# Altium PCB shield_power.PcbDoc
Units mm, origin at the board's own origin, x right, y up, seen from the top; angles counter-clockwise.
Board outline 100 x 92.5 mm, 2 copper layers (Top Layer, Bottom Layer), stack 1.584 mm thick; 13 components, 9 nets, 34 pads, 10 vias.
Unrouted connection lines stored in the file: 8.
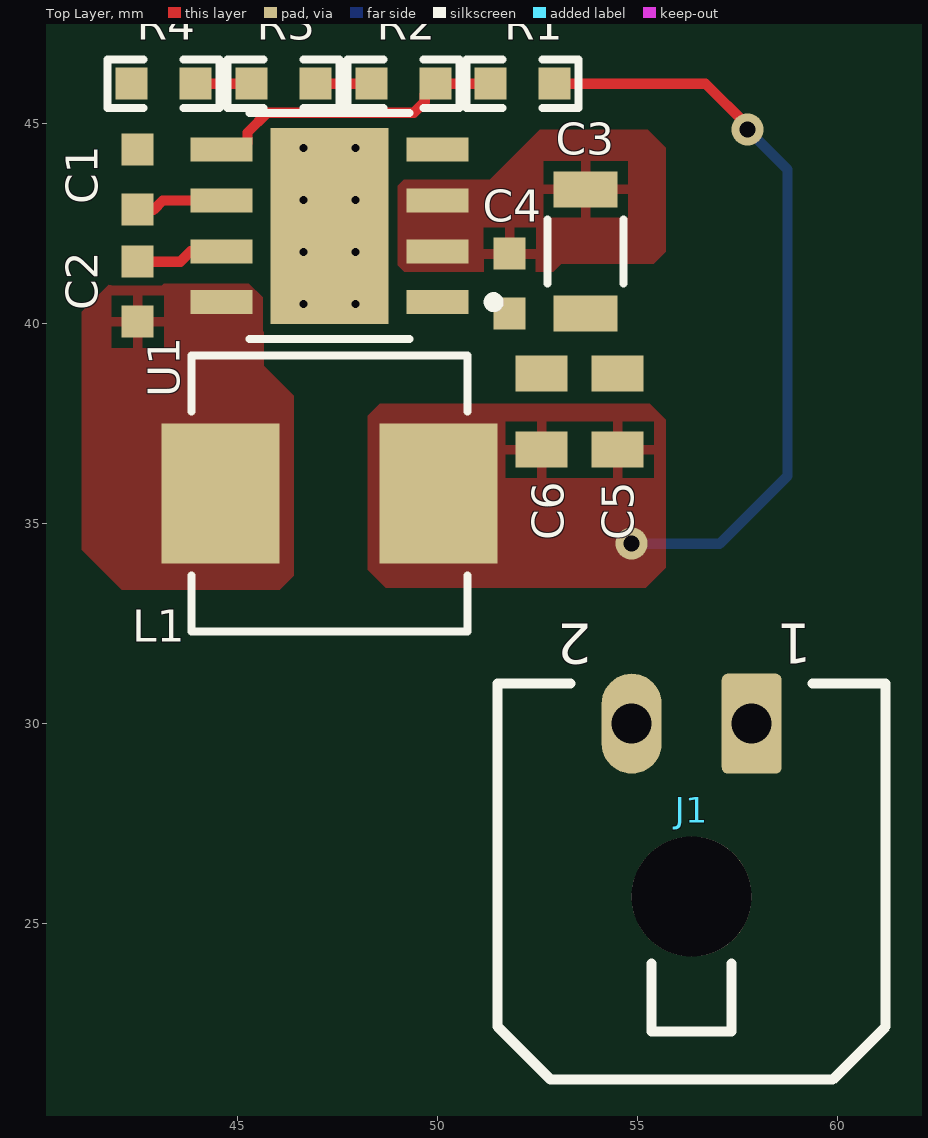
[diagram p0: Top Layer view]
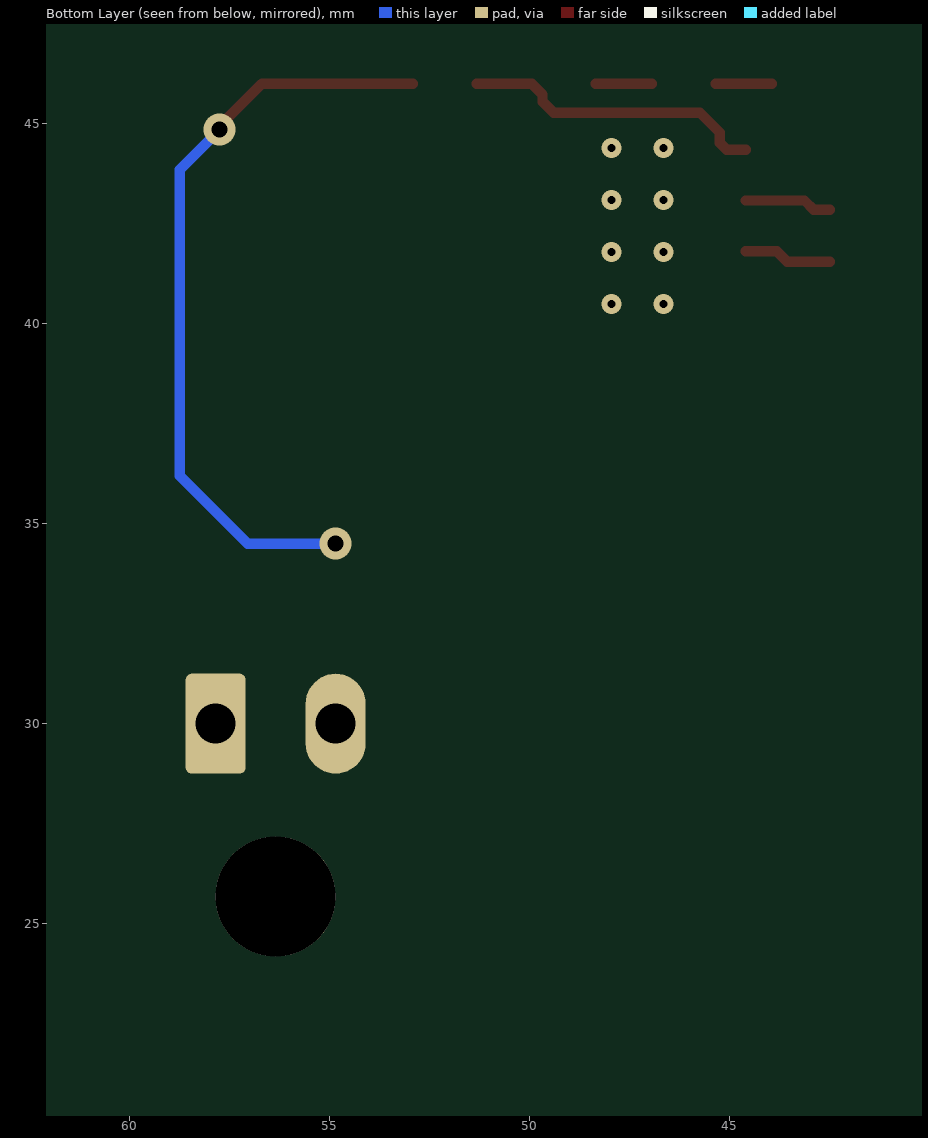
[diagram p1: Bottom Layer view, seen from below]
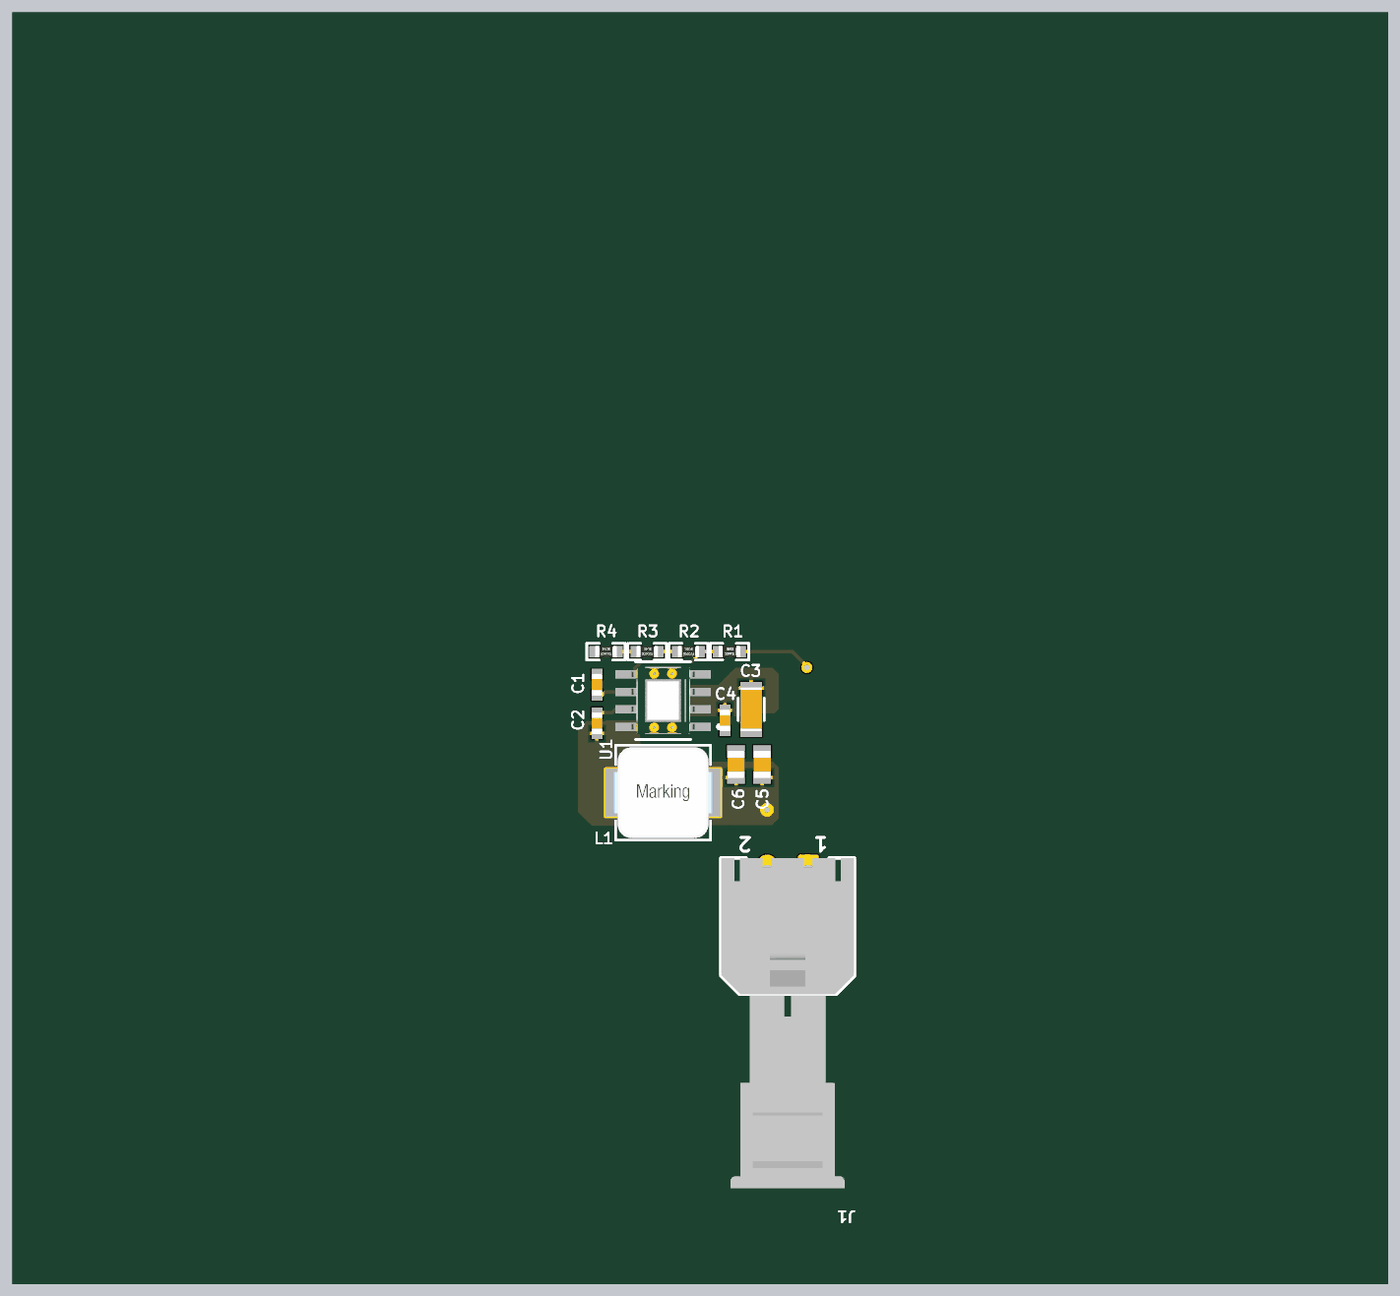
[diagram p2: 3D render of the assembled board from above, using the file's embedded part models]

## Layer stack, top to bottom
Top Solder Mask: solder mask 0.005, Solder Resist, Dk 3.5
Top Layer: signal copper 0.035
Dielectric 1: core 1.514, FR-4, Dk 4.2
Bottom Layer: signal copper 0.035
Botom Solder Mask: solder mask 0.005, Solder Resist, Dk 3.5

## Board outline
0,0 0,92.5 100,92.5 100,0

## Design rules (kind name [scope] priority, off if disabled: settings)
AssemblyTestPointUsage [All] p1 off:
AssemblyTestpoint [All] p1 off: testpointundercomponent=TRUE minsize=1.016 maxsize=2.54 preferedsize=1.524 minholesize=0 maxholesize=1.016 preferedholesize=0.813 testpointgrid=0.025 usegrid=TRUE gridtolerance=0 allowsidetop=TRUE allowsidebottom=TRUE
BoardOutlineClearance X_BoardOutlineClearance [HasFootprint('MOUSE_BITES_3X_2_4MM') or  HasFootprint('MOUSE_BITES_5X_2_4MM') or HasFootprint('IN_TAB_2_4_EXT')] p1: gap=0 ignorepadtopadclearanceinfootprint=FALSE // Excluded components
BoardOutlineClearance [All] p2: gap=0.3 ignorepadtopadclearanceinfootprint=FALSE
Clearance "NPT Hole" [(InPadClass('NPTH'))] p1: gap=0.3 ignorepadtopadclearanceinfootprint=FALSE except(0: Arc-Hole Track-Hole SMDPad-Hole THPad-Hole Via-Hole Fill-Hole Poly-Hole Region-Hole Text-Hole) // Copper Clearance to NPT Hole
Clearance [All] p2: gap=0.2 ignorepadtopadclearanceinfootprint=FALSE except(0: Arc-Hole Track-Hole SMDPad-Hole THPad-Hole Via-Hole Fill-Hole Poly-Hole Region-Hole Text-Hole)
ComponentClearance [Not (HasFootprint('PASTE_STENCIL')) vs Not (HasFootprint('PASTE_STENCIL'))] p1: gap=0.25 collisioncheckmode=3 verticalgap=0.25 showdistances=TRUE
FabricationTestPointUsage [All] p1 off: valid=0 allowmultiple=FALSE
FabricationTestpoint [All] p1 off: side=3 testpointundercomponent=TRUE minsize=1.016 maxsize=2.54 preferedsize=1.524 minholesize=0 maxholesize=1.016 preferedholesize=0.813 testpointgrid=0.025 allowsidetop=TRUE allowsidebottom=TRUE usegrid=TRUE gridtolerance=0
HoleSize [All] p1: absolutevalues=TRUE maxlimit=6 minlimit=0.35 maxpercent=80.000 minpercent=20.000
HoleToHoleClearance [All] p1: gap=0.25 allowstackedmicrovias=TRUE
MinimumAnnularRing [All] p1: minimumring=0.2
MinimumSolderMaskSliver [All] p1: minsoldermaskwidth=0.07
PlaneClearance [All] p1: clearance=0.15
PlaneConnect [All] p1: planeconnectstyle=Relief reliefexpansion=0.5 reliefentries=4 reliefconductorwidth=0.25 reliefairgap=0.25
PolygonConnect "Via Connect" [IsVia] p1: connectstyle=Direct reliefconductorwidth=0.254 reliefentries=4 polygonreliefangle="90 Angle" airgapwidth=0.254 // Via connection style
PolygonConnect [All] p2: connectstyle=Relief reliefconductorwidth=0.25 reliefentries=4 polygonreliefangle="90 Angle" airgapwidth=0.25
RoutingCorners [All] p1: cornerstyle=45-Degree minsetback=2.5 maxsetback=2.5
RoutingVias [All] p1: holewidth=0.4 width=0.8 viastyle="Through Hole" minholewidth=0.2 minwidth=0.6 maxholewidth=1 maxwidth=1.6 useviatemplates=TRUE viatemplateguid#1={26E1B80A-D5C0-4505-9623-F9CB59458B7C} viatemplateguid#2={36E1CC21-96E2-49A4-88B6-F2B68A4AE673} viatemplateguid#3={0111366E-BFF6-48C7-B537-6C96D691991D} viatemplateguid#4={0E0C0ADB-85E7-4A3B-837A-9DB01CC425C1} viatemplateguid#5={2AE59D33-7222-4D26-9EBE-4F327D78EEDC} viatemplateguid#6={04F958C5-3098-48F3-841F-9266846BFB57} viatemplateguid#7={3EBD0A92-59C6-4A03-9F1B-9C85124118A6} viatemplateguid#8={D374DE30-929E-4757-A35D-CCDF97954E77} viatemplateguid#9={7387BB7D-B2C7-482F-BFEA-A07FA82CF54E} viatemplatename#1=v50h15m22 viatemplatename#2=v60h20m28 viatemplatename#3=v80h40m48 viatemplatename#4=v110h70m78 viatemplatename#5=v140h90 viatemplatename#6=v160h100m108 viatemplatename#7=v170h110 viatemplatename#8=v200h130 viatemplatename#9=v260h150
SMDEntry [All] p1: side=TRUE corner=FALSE anyangle=FALSE
SMDEntry ResistorArray_Exit [HasFootprint('CAC-50P200X100-8M')] p2: side=TRUE corner=FALSE anyangle=FALSE
SMDToCorner ResistorArray_NeckDown [HasFootprint('CAC-50P200X100-8M')] p1: distance=78740
SilkToSilkClearance [All] p1: silktosilkclearance=0.1
SilkToSolderMaskClearance [IsPad] p1: minsilkscreentomaskgap=0.1 clearancetoexposedcopper=FALSE
SolderMaskExpansion "PTH Via" [IsVia] p1: expansion=0.075 istentingtop=FALSE soldermaskfromhole=TRUE
SolderMaskExpansion [All] p2: expansion=0.1 istentingtop=FALSE
Width [All] p1: maxlimit=5 minlimit=0.15 preferedwidth=0.3
17 further rules are at their usual default settings.

## Components (designator, comment, footprint, x,y, rotation, side; value= is the part's Value field where it differs from the comment)
C1 "1uF, 25V" WCAP-CSGP_0603_L1.6W0.8H0.8_Reflow 42.5,43.6 r90 top
C2 "100n" WCAP-CSGP_0603_L1.6W0.8H0.8_Reflow 42.5,40.8 r90 top
C3 "10uF" WCAP-CSGP_1206_L3.2W1.6H1.6 53.702,41.81 r90 top
C4 "220nF" WCAP-CSGP_0603_L1.6W0.8H0.8_Reflow 51.8,41 r90 top
C5 "22uF, 10V" WCAP-CSGP_0805_L2W1.25H1.25 54.5,37.8 r270 top
C6 "22uF, 10V" WCAP-CSGP_0805_L2W1.25H1.25 52.6,37.8 r270 top
J1 "43650-0200" MOLEX_43650-0200 56.352,30 r180 top
L1 "2.2uH, 6.5A" WE-LHMI_7030 47.3,35.75 r0 top
R1 "Thick film" RES_0603 52.125,46 r0 top value=100k
R2 "Thick film" RES_0603 49.15,46 r0 top value=4k7
R3 "Thick film" RES_0603 46.15,46 r0 top value=2k2
R4 "Thick film" RES_0603 43.15,46 r0 top value=18k
U1 "LMR33630ADDAR" FP-DDA0008J-MFG 47.3,42.445 r180 top

## Footprints (in the part's own frame and the unit in brackets; to place one, negate y for a bottom-side part, rotate by r counter-clockwise, add the part's x,y. Pads: shape width x height; smd on the part's side, far side on the other; paste and mask are expansions set on the pad)
FP-DDA0008J-MFG [mm]
  rect 1.55x0.6 smd paste+0 mask+0: 1(-2.7,1.905) 2(-2.7,0.635) 3(-2.7,-0.635) 4(-2.7,-1.905) 5(2.7,-1.905) 6(2.7,-0.635) 7(2.7,0.635) 8(2.7,1.905)
  rect 2.95x4.9 smd paste-1000 mask-1000: 9(0,0)
  silkscreen extent -4.23,-2.83 2,2.83, body extent -3.57,-2.75 3.57,2.75, height 0.25
MOLEX_43650-0200 [mm] "Micro-Fit 3.0 Header, THT, Single Row, Horizontal, with PCB Polarizing Peg, 2 Circuits, with mate"
  rrect20% 1.5x2.5 hole 1: 1(-1.5,0)
  oval 1.5x2.5 hole 1: 2(1.5,0)
  round 3 hole 3 unplated: #(0,4.32)
  silkscreen extent -4.85,-1 4.85,8.9, body extent -4.82,-1 4.83,23, height 6.9
RES_0603 [mm]
  rect 0.8x0.8 smd: 1(-0.8,0) 2(0.8,0)
  silkscreen extent -1.4,-0.6 1.4,0.6, body extent -0.78,-0.43 0.78,0.42, height 0.45
WCAP-CSGP_0603_L1.6W0.8H0.8_Reflow [mm] "Ceramic Capacitors, body 1.6x0.8mm"
  rect 0.8x0.8 smd: 1(-0.75,0) 2(0.75,0)
  body extent -0.8,-0.4 0.8,0.4, height 0.8
WCAP-CSGP_0805_L2W1.25H1.25 [mm] "Ceramic Capacitors, body 2x1.25mm"
  rect 0.9x1.3 smd: 1(-0.95,0) 2(0.95,0)
  body extent -1,-0.63 1,0.63, height 1.25
WCAP-CSGP_1206_L3.2W1.6H1.6 [mm] "Ceramic Capacitors, body 3.2x1.6mm"
  rect 0.9x1.6 smd: 1(-1.55,0) 2(1.55,0)
  silkscreen extent -0.8,-0.95 0.8,0.95, body extent -1.6,-0.8 1.6,0.8, height 1.6
WE-LHMI_7030 [mm] "SMT Power Inductor, 2-Leads, body 6.6x6.6mm"
  rect 2.95x3.5 smd: 1(-2.725,0) 2(2.725,0)
  silkscreen extent -3.45,-3.45 3.45,3.45, body extent -3.65,-3.3 3.65,3.3, height 2.8

## Part data
C1: library part 885012206076, "WCAP-CSGP Multilayer Ceramic Chip Capacitor, General Purpose, size 0603, X7R, 1uF, 25V", Capacitance=1uF, Capacitance Tolerance=+/-10%, Isolation Resistance=0.5GOhm, Manufacturer="Wurth Elektronik", Operating Temperature max.=125C, Operating Temperature min.=-55C, Rated Voltage=25V, Ceramic Type=X7R, ComponentLink1Description="Manufacturer Link", ComponentLink1URL=http://www.we-online.de, ComponentLink2Description=Datasheet, ComponentLink2URL=https://www.we-online.com/catalog/datasheet/885012206076.pdf, Dissipation Factor=10%, Height=0.8mm, Length=1.6mm, Manufacturer Part Number=885012206076, Mounting Technology=SMT, Packaging="Tape and Reel", Size=0603, Technical Reference=X7R0603105K025DFCT10000, Width=0.8mm
C2: library part 885012206071R, "WCAP-CSGP Multilayer Ceramic Chip Capacitor, General Purpose, size 0603, X7R, 100nF, 25V", Capacitance=100nF, Capacitance Tolerance=+/-10%, Isolation Resistance=5GOhm, Manufacturer="Wurth Elektronik", Operating Temperature max.=125C, Operating Temperature min.=-55C, Rated Voltage=25V, Ceramic Type=X7R, ComponentLink1Description="Manufacturer Link", ComponentLink1URL=http://www.we-online.de, ComponentLink2Description=Datasheet, ComponentLink2URL=https://www.we-online.com/catalog/datasheet/885012206071R.pdf, Dissipation Factor=3.5%, Height=0.8mm, Length=1.6mm, Manufacturer Part Number=885012206071R, Mounting Technology=SMT, Packaging="Tape and Reel", Size=0603, Technical Reference=X7R0603104K025DFCT20000, Width=0.8mm
C3: library part 885012108022, "WCAP-CSGP Multilayer Ceramic Chip Capacitor, General Purpose, size 1206, X5R, 10uF, 50V", Capacitance Tolerance=+/-10%, Isolation Resistance=0.005GOhm, Manufacturer="Wurth Elektronik", Operating Temperature max.=85C, Operating Temperature min.=-55C, Rated Voltage=50V, Capacitance=10uF, Ceramic Type=X5R, ComponentLink1Description="Manufacturer Link", ComponentLink1URL=http://www.we-online.de, ComponentLink2Description=Datasheet, ComponentLink2URL=https://www.we-online.com/catalog/datasheet/885012108022.pdf, Dissipation Factor=10%, Height=1.6mm, Length=3.2mm, Manufacturer Part Number=885012108022, Mounting Technology=SMT, Packaging="Tape and Reel", Size=1206, Technical Reference=X5R1206106K050DFCT10000, Width=1.6mm
C4: library part 885012206125, "WCAP-CSGP Multilayer Ceramic Chip Capacitor, General Purpose, size 0603, X7R, 220nF, 50V", Capacitance Tolerance=+/-5%, Isolation Resistance=2.3GOhm, Manufacturer="Wurth Elektronik", Operating Temperature max.=125C, Operating Temperature min.=-55C, Rated Voltage=50V, Capacitance=220nF, Ceramic Type=X7R, ComponentLink1Description="Manufacturer Link", ComponentLink1URL=http://www.we-online.de, ComponentLink2Description=Datasheet, ComponentLink2URL=https://www.we-online.com/catalog/datasheet/885012206125.pdf, Dissipation Factor=10%, Height=0.8mm, Length=1.6mm, Manufacturer Part Number=885012206125, Mounting Technology=SMT, Packaging="Tape and Reel", Size=0603, Technical Reference=X7R0603224J050DFCT10000, Width=0.8mm
C5 C6: library part 885012107011, "WCAP-CSGP Multilayer Ceramic Chip Capacitor, General Purpose, size 0805, X5R, 22uF, 10V", Capacitance=22uF, Capacitance Tolerance=+/-20%, Isolation Resistance=0.005GOhm, Manufacturer="Wurth Elektronik", Operating Temperature max.=85C, Operating Temperature min.=-55C, Rated Voltage=10V, Ceramic Type=X5R, ComponentLink1Description="Manufacturer Link", ComponentLink1URL=http://www.we-online.de, ComponentLink2Description=Datasheet, ComponentLink2URL=https://www.we-online.com/catalog/datasheet/885012107011.pdf, Dissipation Factor=10%, Height=1.25mm, Length=2mm, Manufacturer Part Number=885012107011, Mounting Technology=SMT, Packaging="Tape and Reel", Size=0805, Technical Reference=X5R0805226M010DFCT10000, Width=1.25mm
J1: library part EJ-43650-0200XX0, "Con; Micro Fit 3.0; 2x; PCB; Right angle; 600V; 5A; Male; Nickel; ??;", Current_Rating_A=5, Manufacturer="MOLEX: 43650-0200", Voltage_Rating_V=600, Angle="Right angle", Component_class=Connector, ComponentLink1Description=Helios, ComponentLink1URL=heliosgreen://v1/hegMT/5-MT/Classes(343)/Folders/OpenForm?RecordNumbers=[11652171], ComponentLink2Description=EJ-43650-0200XX0_MolexEN100.pdf, ComponentLink2URL=I:\datasheets\EJ-43650-0200XX0_MolexEN100.pdf, Connector_Family="Micro Fit 3.0", Gender=Male, KK=EJ-43650-0200XX0, Mounting_Style=PCB, Multiplicity=2, Plating=Nickel, SMD=0, Status_I=Production, Status_II=Active, System=Connector
L1: library part 74437346022, "WE-LHMI SMT Power Inductor, size 7030, 2.2uH, 6.5A", DC Resistance max.=20mOhm, DC Resistance typ.=18mOhm, Inductance=2.2uH, Manufacturer="Wurth Elektronik", Operating Temperature="-40 to +125degC", Rated Current=6.5A, Saturation Current @10%=10A, Saturation Current @30%=19.1A, Self Resonant Frequency=32MHz, ComponentLink1Description=Manufacturer, ComponentLink1URL=http://www.we-online.de, ComponentLink2Description=Datasheet, ComponentLink2URL=https://www.we-online.com/catalog/datasheet/74437346022.pdf, Height=2.8mm, Length=6.6mm, Manufacturer Part Number=74437346022, Mounting Technology=SMT, Packaging="Tape and Reel", Size=7030, Width=6.6mm
R1: library part RES_100k_5%_0603, "100000.00", Case [EIA]=0603, Case [Metric]=1608, Power Rating [W]=0.1, Tolerance [%]=±5, Value [Ω]=100000.00
R2: library part RES_4k7_5%_0603, "4700.00", Case [EIA]=0603, Case [Metric]=1608, Power Rating [W]=0.1, Tolerance [%]=±5, Value [Ω]=4700.00
R3: library part RES_2k2_5%_0603, "2200.00", Case [EIA]=0603, Case [Metric]=1608, Power Rating [W]=0.1, Tolerance [%]=±5, Value [Ω]=2200.00
R4: library part RES_18k_5%_0603, "18000.00", Case [EIA]=0603, Case [Metric]=1608, Power Rating [W]=0.1, Tolerance [%]=±5, Value [Ω]=18000.00
U1: library part CMP-04918-000184-1, "IC REG BUCK ADJUSTABLE 3A 8SOPWR", Max Input Voltage=36V, Max Operating Temperature=125°C, Max Output Voltage=24V, Min Input Voltage=3.8V, Min Operating Temperature=-40°C, Min Output Voltage=1V, Output Current=3A, Switching Frequency=400kHz, Mount="Surface Mount", Number of Outputs=1, Number of Pins=8, Output Configuration=Positive, Output Type=Adjustable, Packaging="Cut Tape", RoHS Compliant=Yes, Synchronous Rectifier=Yes

## Via types
v1: diameter 0.5, hole 0.2, Top Layer to Bottom Layer, 8 vias
v2: diameter 0.8, hole 0.4, Top Layer to Bottom Layer, 2 vias

## Nets (pads, with @x,y where several pads share a name; then routed paths per layer and width w, separated by ;. In a path a pad name is that pad's centre, name@x,y a point inside that pad or via, vN(x,y) a via of type N, cw(c..) or ccw(c..) an arc to the next point about the centre after c; other vN are vias at no path point)
+5V: C5.2 C6.2 J1.2 L1.2 R1.2 | length 19
  Top Layer w0.254: R1.2 56.695,46 57.75,44.945 v2(57.75,44.85)
  Bottom Layer w0.254: v2(54.852,34.5) 57.05,34.5 58.75,36.2 58.75,43.85 v2(57.75,44.85)
BATT: C3.2 C4.2 U1.2 U1.3
GND: C1.2 C3.1 C4.1 C5.1 C6.1 J1.1 R4.1 U1.1 U1.9
  other v1: 46.65,40.495 47.95,40.495 46.65,41.795 47.95,41.795 46.65,43.095 47.95,43.095 46.65,44.395 47.95,44.395
NetC1_1: C1.1 U1.6 | length 2.2
  Top Layer w0.254: C1.1 42.9,42.85 43.13,43.08 U1.6
NetC2_1: C2.1 L1.1 U1.8
NetC2_2: C2.2 U1.7 | length 2.2
  Top Layer w0.254: C2.2 43.565,41.55 43.825,41.81 U1.7
NetR1_1: R1.1 R2.2 U1.5 | length 7.7
  Top Layer w0.254: U1.5 45.075,44.35 45.248,44.523 45.248,44.78 45.741,45.273 49.403,45.273 49.677,45.547 49.677,45.727 R2.2 R1.1
NetR2_1: R2.1 R3.2 | length 1.4
  Top Layer w0.254: R3.2 R2.1
NetR3_1: R3.1 R4.2 | length 1.4
  Top Layer w0.254: R4.2 R3.1
pads on no net: J1.# U1.4

## Polygon pours and split planes (outlines as drawn)
BATT on Top Layer "BATT_L01_P002" (solid, remove dead copper, pour order 2): 49,41.46 49.16,41.3 52.892,41.3 53.092,41.5 55.4,41.5 55.7,41.8 55.7,44.4 55.25,44.85 52.55,44.85 51.3,43.6 49.15,43.6 49,43.45
+5V on Top Layer "+5V_L01_P001" (solid, remove dead copper, pour order 1): 48.25,37.7 48.55,38 55.3,38 55.7,37.6 55.7,33.9 55.2,33.4 48.7,33.4 48.25,33.85
NetC2_1 on Top Layer "NETC2_1_L01_P000" (solid, remove dead copper, pour order 0): 45.281,41 45.65,40.63 45.65,38.95 46.4,38.2 46.4,33.7 46.05,33.35 42.1,33.35 41.1,34.35 41.1,40.3 41.8,41

## Silkscreen, mask and mechanical layers (free items; w line width, h text height)
Panel Outline:
  the board outline again, w0.2

## Text inside footprints (layer, text, board x,y; h text height)
J1: Top Silkscreen "1" at 59.352,32.5 h1 r180; Top Silkscreen "2" at 53.852,32.5 h1 r180